# Altium PCB PCB.PcbDoc
Units mil, origin at the board's own origin, x right, y up, seen from the top; angles counter-clockwise.
Board outline 2500 x 2500 mil, 2 copper layers (Top Layer, Bottom Layer); 19 components, 32 nets, 103 pads, 87 vias.
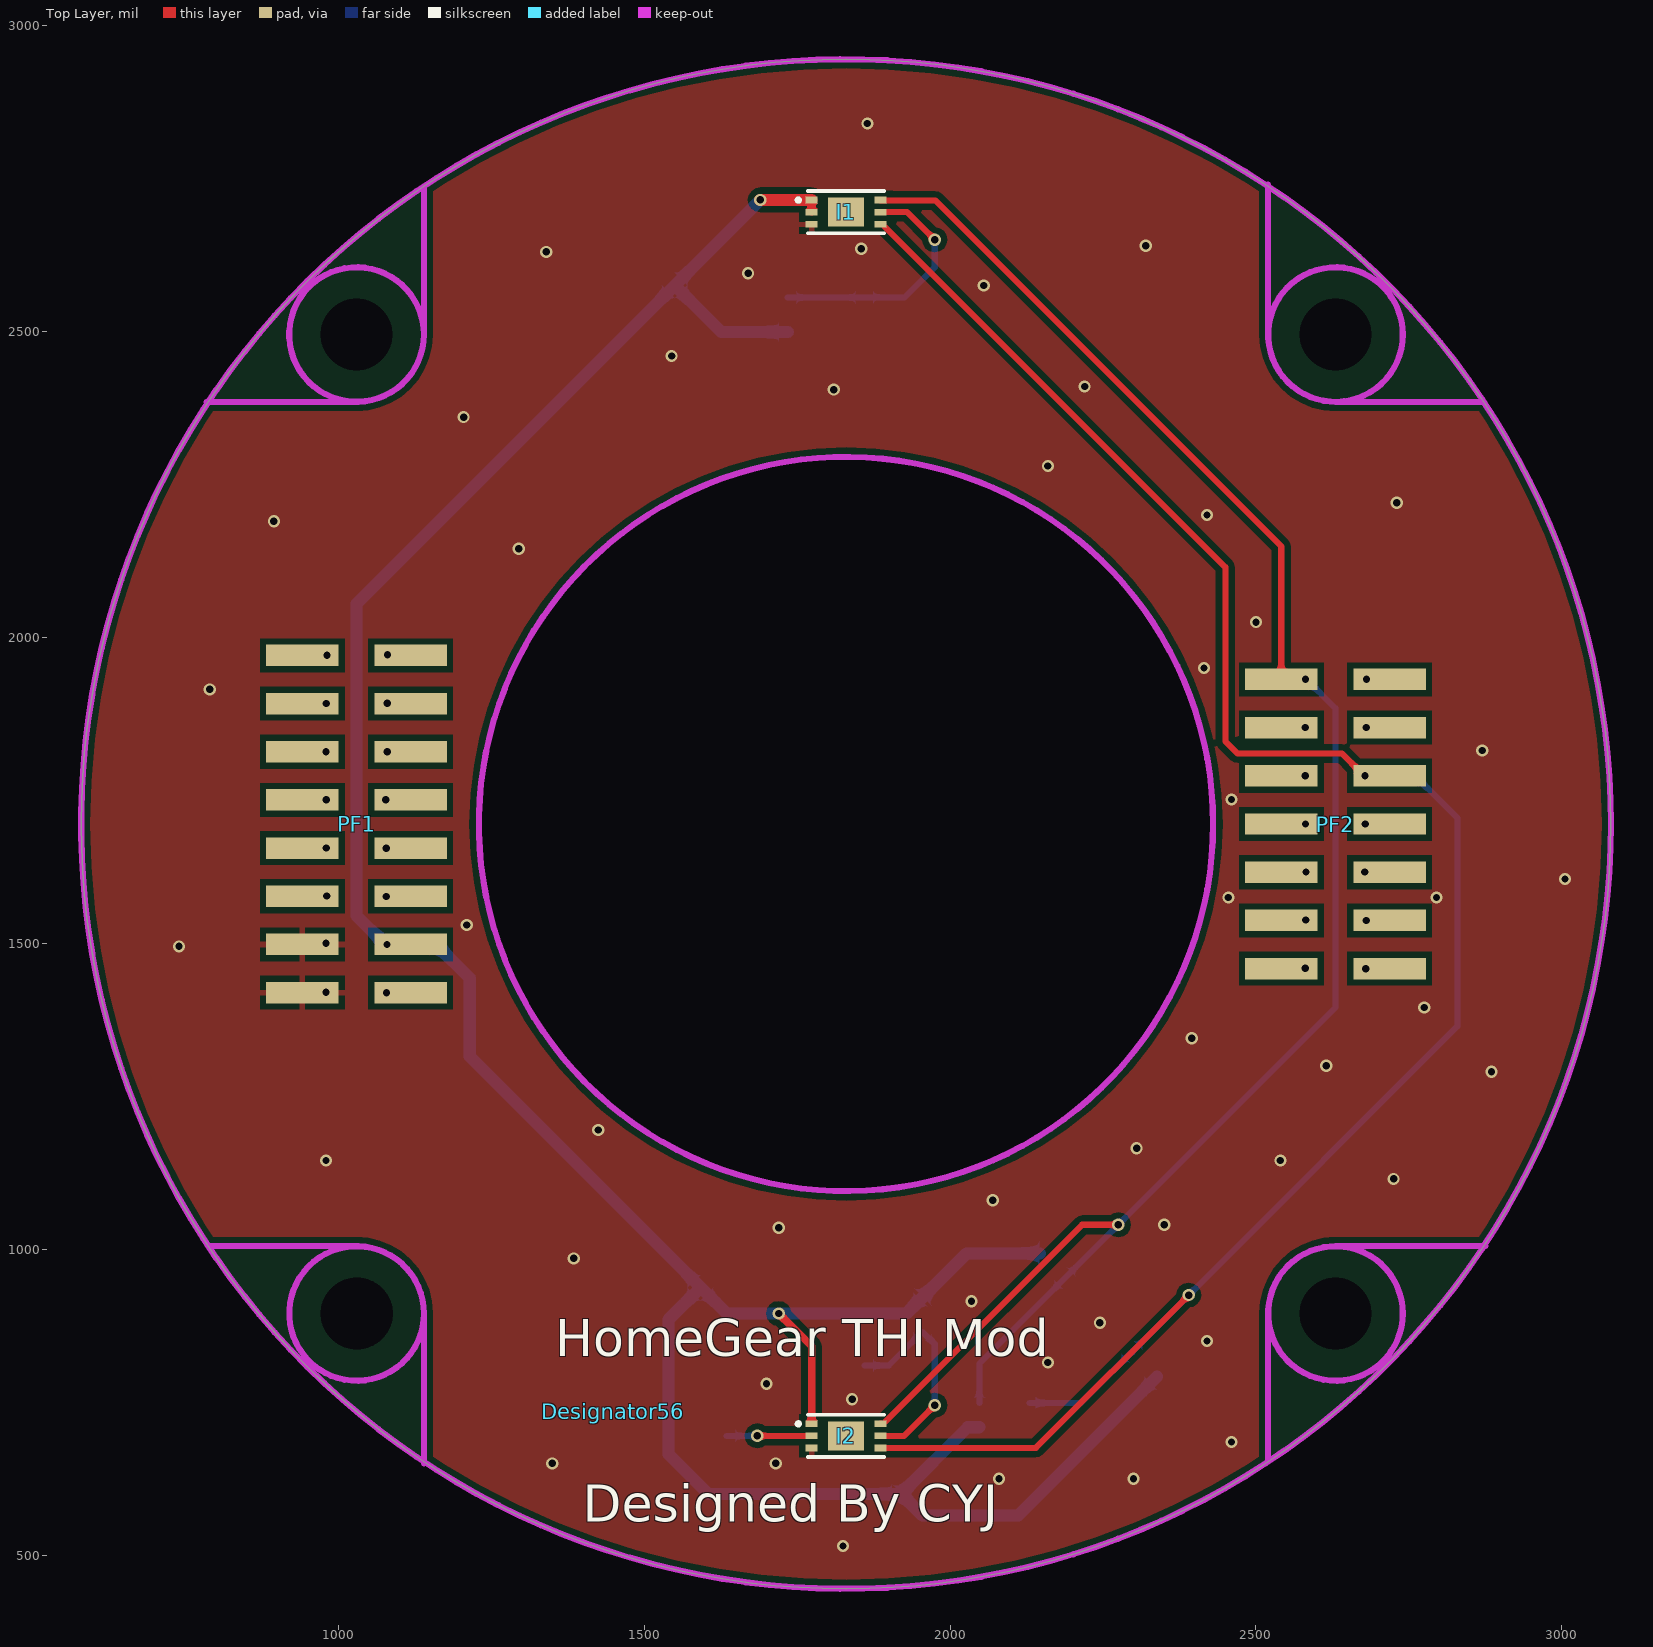
[diagram p0: Top Layer view]
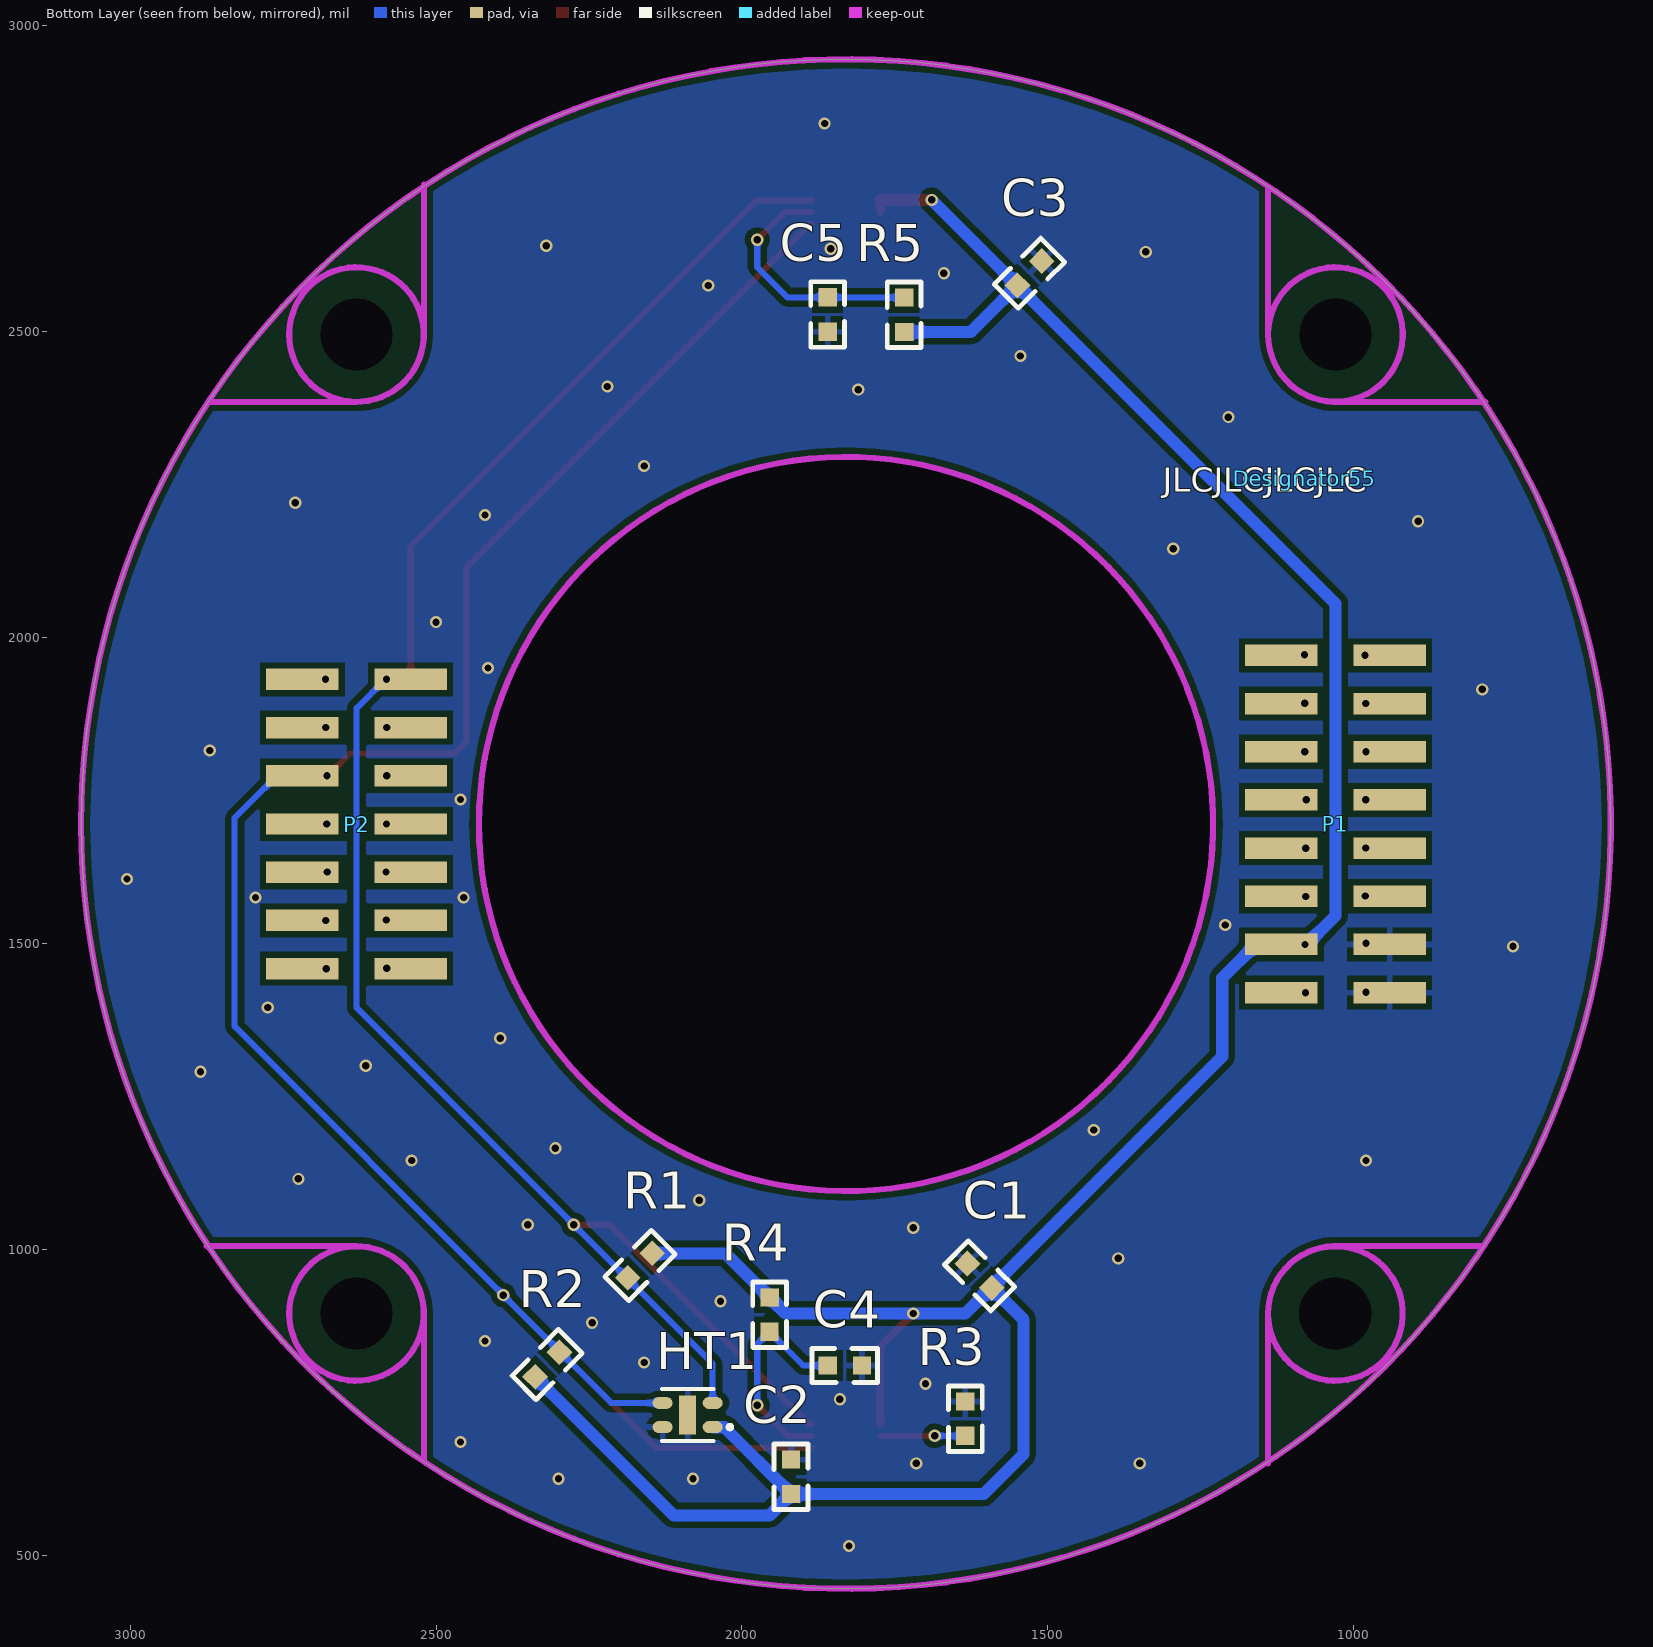
[diagram p1: Bottom Layer view, seen from below]
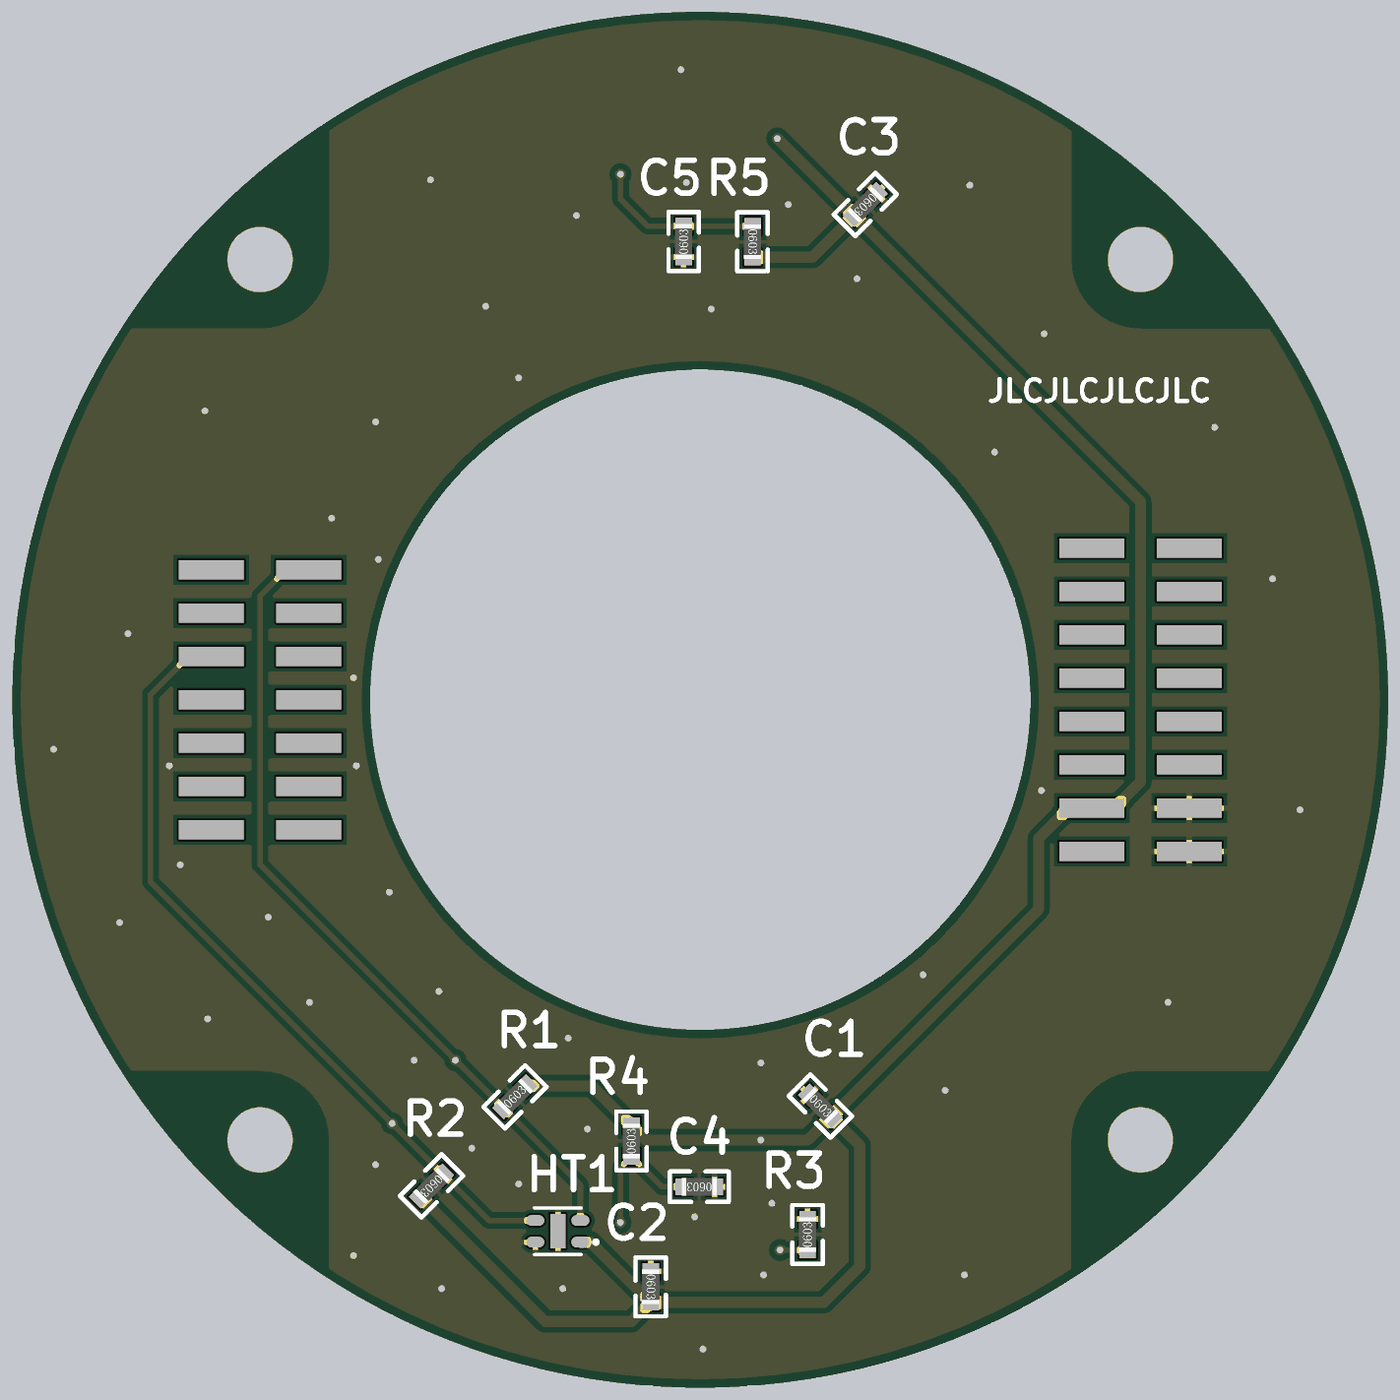
[diagram p2: 3D render of the assembled board from below, using the file's embedded part models]

## Layer stack, top to bottom
Top Solder: solder mask 0.4, Solder Resist, Dk 3.5
Top Layer: signal copper 1.4
Dielectric 1: dielectric 12.6, FR-4, Dk 4.8
Bottom Layer: signal copper 1.4
Bottom Solder: solder mask 0.4, Solder Resist, Dk 3.5

## Board outline
580,1695 ccw(c1830,1695) 1830,445 ccw(c1830,1695) 3080,1695 ccw(c1830,1695) 1830,2945 ccw(c1830,1695)
cut-out: 1230,1695 ccw(c1830,1695) 1830,1095 ccw(c1830,1695) 2430,1695 ccw(c1830,1695) 1830,2295 ccw(c1830,1695)

## Design rules (kind name [scope] priority, off if disabled: settings)
Clearance [All] p1: gap=10 ignorepadtopadclearanceinfootprint=FALSE except(0: Arc-Hole Track-Hole SMDPad-Hole THPad-Hole Via-Hole Fill-Hole Poly-Hole Region-Hole Text-Hole; 5: Arc-Arc Arc-Track Arc-SMDPad Track-Track Track-SMDPad SMDPad-SMDPad)
PolygonConnect [All] p1: thpad.connectstyle=Relief thpad.reliefconductorwidth=10 thpad.reliefentries=4 thpad.polygonreliefangle="90 Angle" thpad.airgapwidth=10 smdpad.connectstyle=Relief smdpad.reliefconductorwidth=10 smdpad.reliefentries=4 smdpad.polygonreliefangle="90 Angle" smdpad.airgapwidth=10 via.connectstyle=Direct via.reliefconductorwidth=10 via.reliefentries=4 via.polygonreliefangle="90 Angle" via.airgapwidth=10
RoutingVias [All] p1: holewidth=28 width=50 viastyle="Through Hole" minholewidth=28 minwidth=50 maxholewidth=28 maxwidth=50
SolderMaskExpansion [All] p1: expansion=4 istentingtop=FALSE
Width [All] p1: maxlimit=99 minlimit=10 preferedwidth=20 minimp=50.000000 maximp=50.000000 favimp=50.000000
30 further rules are at their usual default settings.

## Classes and differential pairs
component class Sheet: C1 C2 C3 C4 C5 HT1 I1 I2 P1 P2 PF1 PF2 R1 R2 R3 R4 R5

## Components (designator, comment, footprint, x,y, rotation, side; value= is the part's Value field where it differs from the comment)
C1 "Cap" MY0603 1610,955 r225 bottom value=0.1uF
C2 "Cap" MY0603 1920,625.8 r270 bottom value=0.1uF
C3 "Cap" MY0603 1531.6,2593.56 r315 bottom value=0.1uF
C4 "Cap" MY0603 1834.2,810 r0 bottom value=1uF
C5 "Cap" MY0603 1860,2530 r90 bottom value=1uF
Designator55 "Comment" JLC_CLI_NO 1080,2260 r180 bottom
Designator56 "Comment" DesignedByCYJ 1450,735 r0 top
HT1 "SHTC3" SHTC3 2088.82,729.07 r90 bottom locked
I1 "BH1750FVI" BH1750_SMD 1830,2695 r0 top locked
I2 "BH1750FVI" BH1750_SMD 1830,695 r0 top locked
P1 "Header 8X2" SMD_PIN_HDR8x2_2.0MM 1030,1695 r270 bottom locked
P2 "Header 7X2" SMD_PIN_HDR7x2_2.0MM 2630,1695 r270 bottom locked
PF1 "Header 8X2" SMD_FEM_HDR8x2_2.0MM 1030,1695 r270 top locked
PF2 "Header 7X2" SMD_FEM_HDR7x2_2.0MM 2630,1695 r270 top locked
R1 "Res" MY0603 2165,975 r135 bottom value=10K
R2 "Res" MY0603 2320,810 r315 bottom value=10K
R3 "Res" MY0603 1634.89,725.44 r90 bottom value=10K
R4 "Res" MY0603 1954.89,895.44 r90 bottom value=1K
R5 "Res" MY0603 1735,2525 r270 bottom value=1K

## Footprints (in the part's own frame and the unit in brackets; to place one, negate y for a bottom-side part, rotate by r counter-clockwise, add the part's x,y. Pads: shape width x height; smd on the part's side, far side on the other; paste and mask are expansions set on the pad)
BH1750_SMD [mm]
  rect 0.505x0.28 smd: 1(-1.428,0.5) 2(-1.428,0) 3(-1.428,-0.5) 4(1.428,-0.5) 5(1.428,0) 6(1.428,0.5)
  rect 1.5x1.2 smd: 7(0,0)
  silkscreen extent -2.05,-0.88 1.58,0.88
DesignedByCYJ [mil]
JLC_CLI_NO [mil]
MY0603 [mil]
  rect 30x30 smd: 1(-30.44,0.11) 2(25.8,0)
  silkscreen extent -56,-28 51,28, body extent -34,-16 29,16, height 18
SHTC3 [mm]
  oval 0.49x0.83 smd: 1(-0.5,-1.04) 2(0.5,-1.04) 3(0.5,1.04) 4(-0.5,1.04)
  rect 1.6x0.7 smd: 5(0,0)
  silkscreen extent -1.08,-1.84 1.08,1.08
SMD_FEM_HDR7x2_2.0MM [mm]
  rect 0.89x3 smd: 1(-6,-2.25) 2(-6,2.25) 3(-4,-2.25) 4(-4,2.25) 5(-2,-2.25) 6(-2,2.25) 7(0,-2.25) 8(0,2.25) 9(2,-2.25) 10(2,2.25) 11(4,-2.25) 12(4,2.25) 13(6,-2.25) 14(6,2.25)
SMD_FEM_HDR8x2_2.0MM [mm]
  rect 0.89x3 smd: 1(-7,-2.25) 2(-7,2.25) 3(-5,-2.25) 4(-5,2.25) 5(-3,-2.25) 6(-3,2.25) 7(-1,-2.25) 8(-1,2.25) 9(1,-2.25) 10(1,2.25) 11(3,-2.25) 12(3,2.25) 13(5,-2.25) 14(5,2.25) 15(7,-2.25) 16(7,2.25)
SMD_PIN_HDR7x2_2.0MM [mm]
  rect 0.89x3 smd: 1(-6,2.25) 2(-6,-2.25) 3(-4,2.25) 4(-4,-2.25) 5(-2,2.25) 6(-2,-2.25) 7(0,2.25) 8(0,-2.25) 9(2,2.25) 10(2,-2.25) 11(4,2.25) 12(4,-2.25) 13(6,2.25) 14(6,-2.25)
SMD_PIN_HDR8x2_2.0MM [mm]
  rect 0.89x3 smd: 1(-7,2.25) 2(-7,-2.25) 3(-5,2.25) 4(-5,-2.25) 5(-3,2.25) 6(-3,-2.25) 7(-1,2.25) 8(-1,-2.25) 9(1,2.25) 10(1,-2.25) 11(3,2.25) 12(3,-2.25) 13(5,2.25) 14(5,-2.25) 15(7,2.25) 16(7,-2.25)

## Part data
C1 C2 C3 C4 C5: "Capacitor", LatestRevisionDate=17-Jul-2002, LatestRevisionNote="Re-released for DXP Platform.", PackageDescription="Radial Cap, Thru-Hole; 2 Leads; 0.3 in Pin Spacing", PackageReference=RAD-0.3, Published=8-Jun-2000, Publisher="Altium Limited"
P1 PF1: "Header, 8-Pin, Dual row", LatestRevisionDate=17-Jul-2002, LatestRevisionNote="Re-released for DXP Platform.", Publisher="Altium Limited"
P2 PF2: "Header, 7-Pin, Dual row", LatestRevisionDate=17-Jul-2002, LatestRevisionNote="Re-released for DXP Platform.", Publisher="Altium Limited"
R1 R2 R3 R4 R5: library part Res2, "Resistor", LatestRevisionDate=17-Jul-2002, LatestRevisionNote="Re-released for DXP Platform.", PackageDescription="Axial Device, Thru-Hole; 2 Leads; 0.4 in Pin Spacing", PackageReference=AXIAL-0.4, Published=8-Jun-2000, Publisher="Altium Limited"

## Free pads (board coordinates)
  round 0 hole 118.11: 2(1030,2495) 2(1030.21,895) 2(2630,895) 2(2630,2494.95)

## Via types
v1: diameter 20, hole 12, Top Layer to Bottom Layer, tented both sides, 57 vias
v2: diameter 20, hole 12, Top Layer to Bottom Layer, 30 vias

## Nets (pads, with @x,y where several pads share a name; then routed paths per layer and width w, separated by ;. In a path a pad name is that pad's centre, name@x,y a point inside that pad or via, vN(x,y) a via of type N, cw(c..) or ccw(c..) an arc to the next point about the centre after c; other vN are vias at no path point)
+3.3: C1.2 C2.2 C3.2 HT1.1 I1.1 I1.2 I2.1 P1.14 PF1.14 R1.2 R2.2 R4.2 R5.2 | length 4866.3
  Top Layer w12.5: v1(1720,895) 1773.8,841.2 I2.1@1773.8,715.52 ; I1.2@1773.8,2695.83 I1.1
  Top Layer w20: v1(1690,2715) 1773.49,2715 I1.1
  Bottom Layer w20: C3.2 C3.2@1550.08,2575.08 ; C1.2 1540,885.01 1540,665 1605,600 C2.2 ; v1(1690,2715) C3.2@1550.08,2575.08 ; R5.2 1625.96,2499.2 C3.2@1550.08,2575.08 ; HT1.1 2047.52,709.03 2029.03,709.03 C2.2 ; R1.2 2026.9,993.25 R4.2 1928.65,895 1635,895 1482.5,1047.5 1215,1315 1215,1443.27 1160.12,1498.15 P1.14 1077.05,1498.15 1030,1545.2 1030,2055 C3.2@1550.08,2575.08 ; R2.2 2111.49,565 1955,565 C2.2
  other v2: 1079.82,1497.98
+5: P1.16 PF1.16
  other v2: 1079,1419.33
CS1: P2.7 PF2.7
  other v2: 2581.01,1695.05
DVI1: C5.2 I1.5 R5.1 | length 413.1
  Top Layer w10: I1.5 1929.99,2695.01 v1(1975,2650)
  Bottom Layer w10: R5.1 1859.64,2555.44 C5.2 1925.8,2555.8 1975,2605 v1(1975,2650)
DVI2: C4.2 I2.5 R4.1 | length 355.6
  Top Layer w10: I2.5 1925.01,695 v1(1975,745)
  Bottom Layer w10: C4.2 1900,810 R4.1 1975,845 v1(1975,745)
GND: C1.1 C2.1 C3.1 C4.1 C5.1 HT1.4 HT1.5 I1.3 I2.3 P1.13 P1.15 PF1.13 PF1.15 R3.2
  other v1: 1825,515 2080,625 2300,625 1350,650 1715,650 2460,685 1840,755 1700,780 2160,815 2420,850 2245,880 2035,915 1385,985 1720,1035 2350,1040 2070,1080 2725,1115 980,1145 2540,1145 2305,1165 1425,1195 2885,1290 2615,1300 2395,1345 2775,1395 740,1495 1210,1530 2455,1575 2795,1575 3005,1605 2460,1735 2870,1815 790,1915 2415,1950 2500,2025 1295,2145 895,2190 2420,2200 2730,2220 2160,2280 1205,2360 1810,2405 2220,2410 1545,2460 2055,2575 1670,2595 1340,2630 1855,2635 2320,2640 1865,2840
  other v2: 980,1420 980,1500
IO0: P2.11 PF2.11
  other v2: 2581.19,1537.99
IO2: P2.14 PF2.14
  other v2: 2679.37,1458.68
IO4: P2.12 PF2.12
  other v2: 2680.19,1537.32
IO12: P1.11 PF1.11
  other v2: 981.52,1577.28
IO13: P1.12 PF1.12
  other v2: 1078.76,1576.54
IO14: P1.10 PF1.10
  other v2: 1078.36,1655.62
IO15: P2.13 PF2.13
  other v2: 2580.37,1459.34
IO25: P1.7 PF1.7
  other v2: 980.48,1734.51
IO26: P1.8 PF1.8
  other v2: 1077.97,1734.71
IO27: P1.9 PF1.9
  other v2: 980.64,1655.71
IO32: P1.5 PF1.5
  other v2: 980.22,1813.33
IO33: P1.6 PF1.6
  other v2: 1080.06,1813.25
IO34: P1.3 PF1.3
  other v2: 980.69,1892.03
IO35: P1.4 PF1.4
  other v2: 1080.24,1892.25
MISO: P2.5 PF2.5
  other v2: 2580.85,1773.86
MOSI: P2.2 PF2.2
  other v2: 2680.61,1931.59
NetI2_2: I2.2 R3.1 | length 138.8
  Top Layer w10: v1(1685,695) I2.2
  Bottom Layer w10: R3.1 v1(1685,695)
RXD0: P2.3 PF2.3
  other v2: 2580.59,1852.67
RXD1: P2.9 PF2.9
  other v2: 2581.89,1616.63
SCK: P2.8 PF2.8
  other v2: 2678.73,1694.97
SCL: HT1.2 I1.6 I2.6 P2.1 PF2.1 R1.1 | length 3115.2
  Top Layer w10: I2.6 1890.63,714.69 2215.94,1040 v1(2275,1040) ; I1.6 1886.71,2714.18 1975.82,2714.18 2541.42,2148.58 PF2.1
  Bottom Layer w10: HT1.2 2047.88,812.88 v1(2275,1040) 2630,1395 2630,1884.17 2582.95,1931.22 P2.1
  other v2: 2581.06,1931.38
SDA: HT1.3 I1.4 I2.4 P2.6 PF2.6 R2.1 | length 3415.9
  Top Layer w10: I2.4 2140.32,675.32 v1(2390,925) ; I1.4 1890.63,2675.32 1891.14,2674.81 1891.14,2673.86 2450,2115 2450,1830 2470,1810 2640.79,1810 2677.05,1773.74 PF2.6
  Bottom Layer w10: HT1.3 2213.75,748.75 2296.44,831.44 R2.1 2298.4,833.4 v1(2390,925) 2829.14,1364.14 2829.14,1705 2828.86,1705 2760.12,1773.74 P2.6
  other v2: 2678.34,1774.05
SENSOR_VN: P1.2 PF1.2
  other v2: 1080.63,1971.4
SENSOR_VP: P1.1 PF1.1
  other v2: 981.88,1970.73
TXD0: P2.4 PF2.4
  other v2: 2680.43,1852.6
TXD1: P2.10 PF2.10
  other v2: 2677.79,1616.61
pads on no net: I1.7 I2.7

## Polygon pours and split planes (outlines as drawn)
GND on Top Layer "NONET_L-01_P-001" (solid, remove dead copper, pour order 2): 525,2990 575,2940 3080,2940 3165,2855 3165,450 2965,250 505,250
no net on Top Layer "NONET_L-01_P-001" (solid, pour order 1): 445,2895
GND on Bottom Layer "NONET_L-01_P-001" (solid, remove dead copper, pour order 0): 440,3005 465,3030 3140,3030 3140,505 2960,325 460,325

## Keep-outs
Keep-Out Layer:
  circle w10: c1030.21,895 r110
  circle w10: c2630,895 r110
  circle w10: c1030,2495 r110
  circle w10: c2630,2494.95 r110
  circle w10: c1830,1695 r1250
  circle w10: c1830,1695 r600
  lines w10: 785.21,2384.79 1030,2384.79 ; 790,1005 1030,1005 ; 1140,2495 1140,2735 ; 1140.21,650.21 1140.21,895 ; 2519.79,2495 2519.79,2739.79 ; 2520,655 2520,895 ; 2630,1005.21 2874.79,1005.21 ; 2630,2385 2870,2385

## Silkscreen, mask and mechanical layers (free items; w line width, h text height)
Top Overlay:
  text "HomeGear THI Mod" at 1355,825 h60
Mechanical 1:
  circle w10: c1830,1695 r600
  circle w10: c1830,1695 r1250

## Text inside footprints (layer, text, board x,y; h text height)
Designator55: Bottom Overlay "JLCJLCJLCJLC" at 1312.13,2237.87 h39.37
Designator56: Top Overlay "Designed By CYJ" at 1400,554.99 h60